# Altium PCB pulseox-clamp-PCB.PcbDoc
Units mm, origin at the board's own origin, x right, y up, seen from the top; angles counter-clockwise.
Board outline 10 x 8 mm, 2 copper layers (Top Layer, Bottom Layer); 5 components, 3 nets, 11 pads, 0 vias.
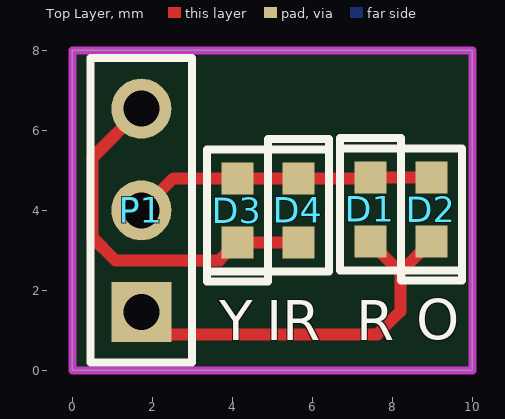
[diagram p0: Top Layer view]
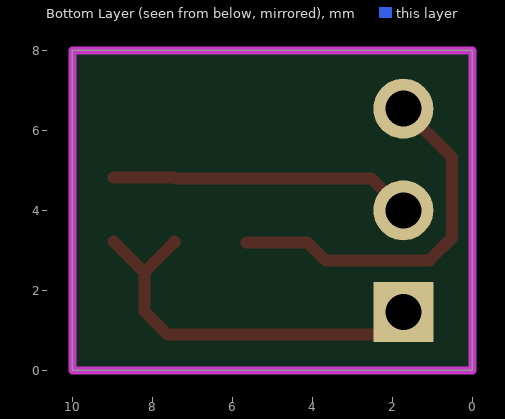
[diagram p1: Bottom Layer view, seen from below]
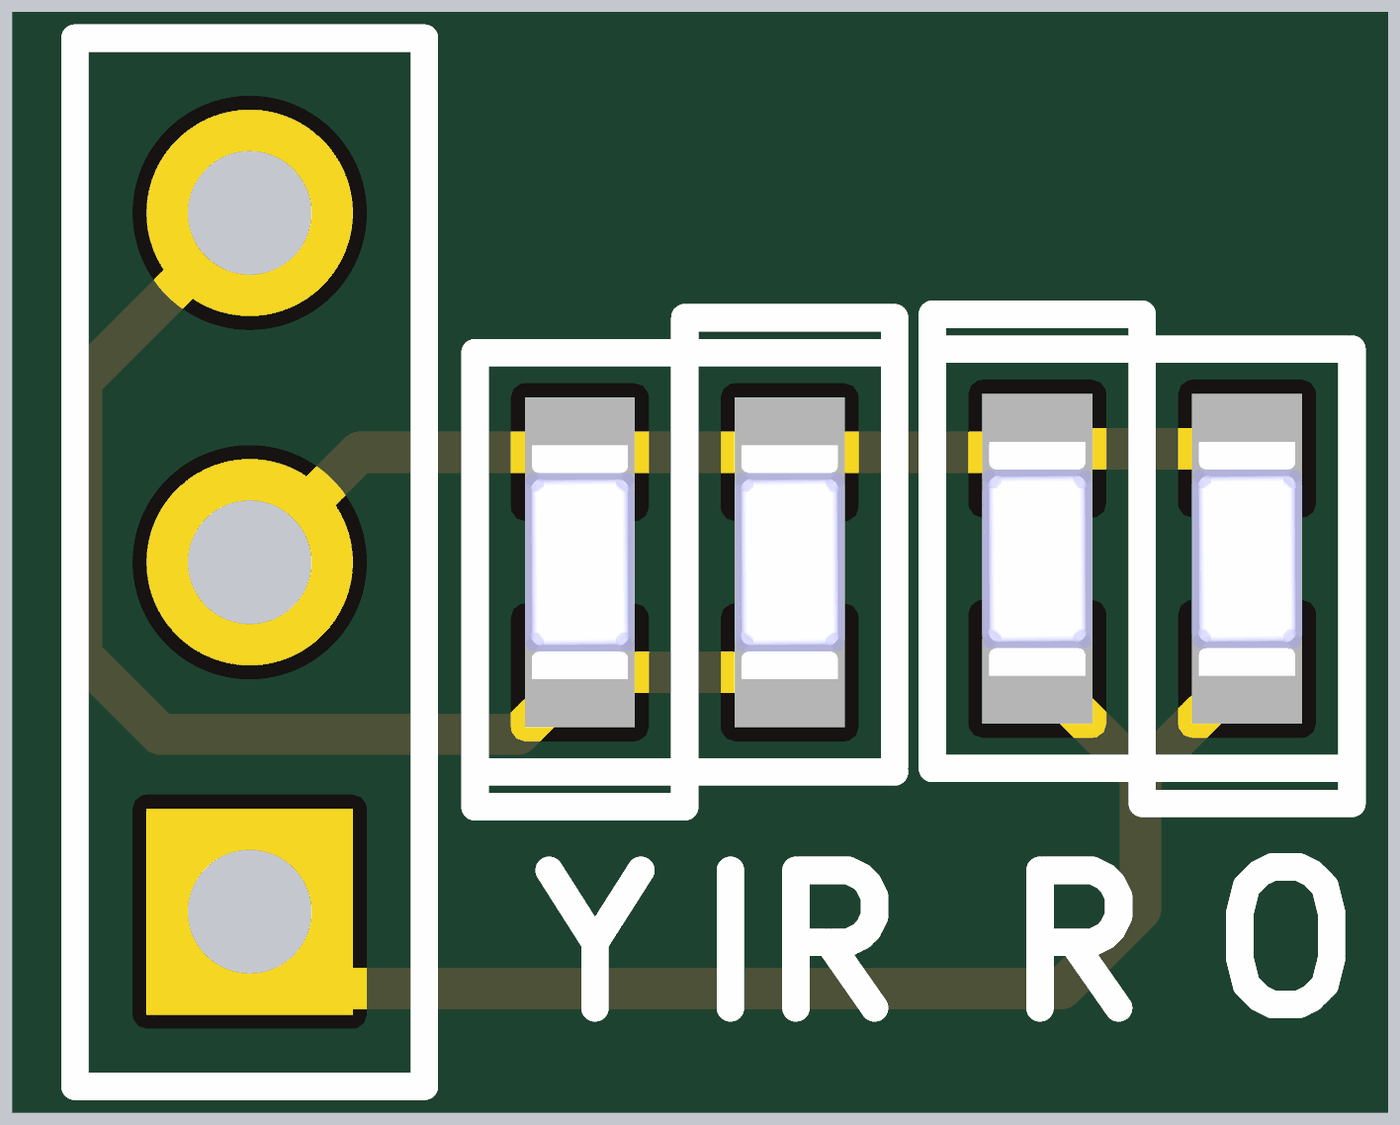
[diagram p2: 3D render of the assembled board from above, using the file's embedded part models]

## Layer stack, top to bottom
Top Solder: solder mask 0.0102, Solder Resist, Dk 3.5
Top Layer: signal copper 0.0356
Dielectric 1: dielectric 0.32, FR-4, Dk 4.8
Bottom Layer: signal copper 0.0356
Bottom Solder: solder mask 0.0102, Solder Resist, Dk 3.5

## Board outline
0,0 10,0 10,8 0,8

## Design rules (kind name [scope] priority, off if disabled: settings)
Clearance [All] p1: gap=0.254 ignorepadtopadclearanceinfootprint=FALSE except(0: Arc-Hole Track-Hole SMDPad-Hole THPad-Hole Via-Hole Fill-Hole Poly-Hole Region-Hole Text-Hole)
PolygonConnect [All] p1: connectstyle=Relief reliefconductorwidth=0.254 reliefentries=4 polygonreliefangle="90 Angle" airgapwidth=0.254
RoutingVias [All] p1: holewidth=0.711 width=1.27 viastyle="Through Hole" minholewidth=0.711 minwidth=1.27 maxholewidth=0.711 maxwidth=1.27
SolderMaskExpansion [All] p1: expansion=0.102
Width [All] p1: maxlimit=2 minlimit=0.254 preferedwidth=0.254 minimp=50.000000 maximp=50.000000 favimp=50.000000
30 further rules are at their usual default settings.

## Components (designator, comment, footprint, x,y, rotation, side; value= is the part's Value field where it differs from the comment)
D1 "598-8030-107F" LED0603 7.45,4.025 r270 top
D2 "SML-LX0603SRW-TR" LED0603 8.975,4.025 r90 top
D3 "APT1608F3C" LED0603 4.125,4 r90 top
D4 "SML-LX0603SYW-TR" LED0603 5.65,4 r270 top
P1 "Header 3" HDR1X3 1.725,1.46 r90 top

## Footprints (in the part's own frame and the unit in brackets; to place one, negate y for a bottom-side part, rotate by r counter-clockwise, add the part's x,y. Pads: shape width x height; smd on the part's side, far side on the other; paste and mask are expansions set on the pad)
HDR1X3 [mm] "Connector; Header; 3 Position"
  rect 1.5x1.5 hole 0.9: 1(0,0)
  round 1.5 hole 0.9: 2(2.54,0) 3(5.08,0)
  silkscreen extent -1.27,-1.27 6.35,1.27
LED0603 [mm]
  rect 0.8x0.8 smd: 1(-0.8,0) 2(0.8,0)
  silkscreen extent -1.78,-0.76 1.52,0.76, body extent -0.85,-0.4 0.85,0.4, height 0.66

## Part data
D1: "Standard LEDs - SMD Orange Water Clr 150mcd 610nm"
D2: "Standard LEDs - SMD Super Red, 660nm 1.7V, 45mcd"
D3: "Infrared Emitters IR 940nm 120 deg Water Clr 1.2 mW/sr"
D4: "Standard LEDs - SMD Super Yellow, 590nm 2V, 60mcd"
P1: "Header, 3-Pin"

## Nets (pads, with @x,y where several pads share a name; then routed paths per layer and width w, separated by ;. In a path a pad name is that pad's centre, name@x,y a point inside that pad or via, vN(x,y) a via of type N, cw(c..) or ccw(c..) an arc to the next point about the centre after c; other vN are vias at no path point)
LED1: D1.2 D2.1 P1.1 | length 10.1
  Top Layer w0.3: P1.1 2.285,0.9 7.625,0.9 8.2,1.475 8.2,2.45 ; D1.2 7.45,3.2 8.2,2.45 ; D2.1 8.2,2.45
LED2: D1.1 D2.2 D3.2 D4.1 P1.2 | length 7.6
  Top Layer w0.3: P1.2 2.525,4.8 D3.2 D4.1 7.425,4.8 D1.1 D2.2
LED3: D3.1 D4.2 P1.3 | length 9.3
  Top Layer w0.3: P1.3 0.504,5.319 0.504,3.321 1.075,2.75 3.675,2.75 D3.1 D4.2

## Keep-outs
Keep-Out Layer:
  circle w0.01: c-64.084,-84.267 r0.013
  circle w0.01: c-64.028,-84.267 r0.013
  circle w0.01: c-63.973,-84.267 r0.013
  lines w0.01: -64.13,-84.305 -63.927,-84.305 -63.927,-84.051 -64.13,-84.051 -64.13,-84.305
  lines w0.2: 0,0 0,8 10,8 10,0 0,0

## Silkscreen, mask and mechanical layers (free items; w line width, h text height)
Top Overlay:
  text "O" at 8.6,0.775 h1
  text "Y" at 3.675,0.75 h1
  text "IR" at 4.85,0.75 h1
  text "R" at 7.1,0.75 h1

## Dimensions
1.725,4 to 10,0 on Mechanical 1
0,8 to 10,8 on Mechanical 1
0,0 to 0,8 on Mechanical 1